# EAGLE board xerc2-1 (EAGLE 7.5.0)
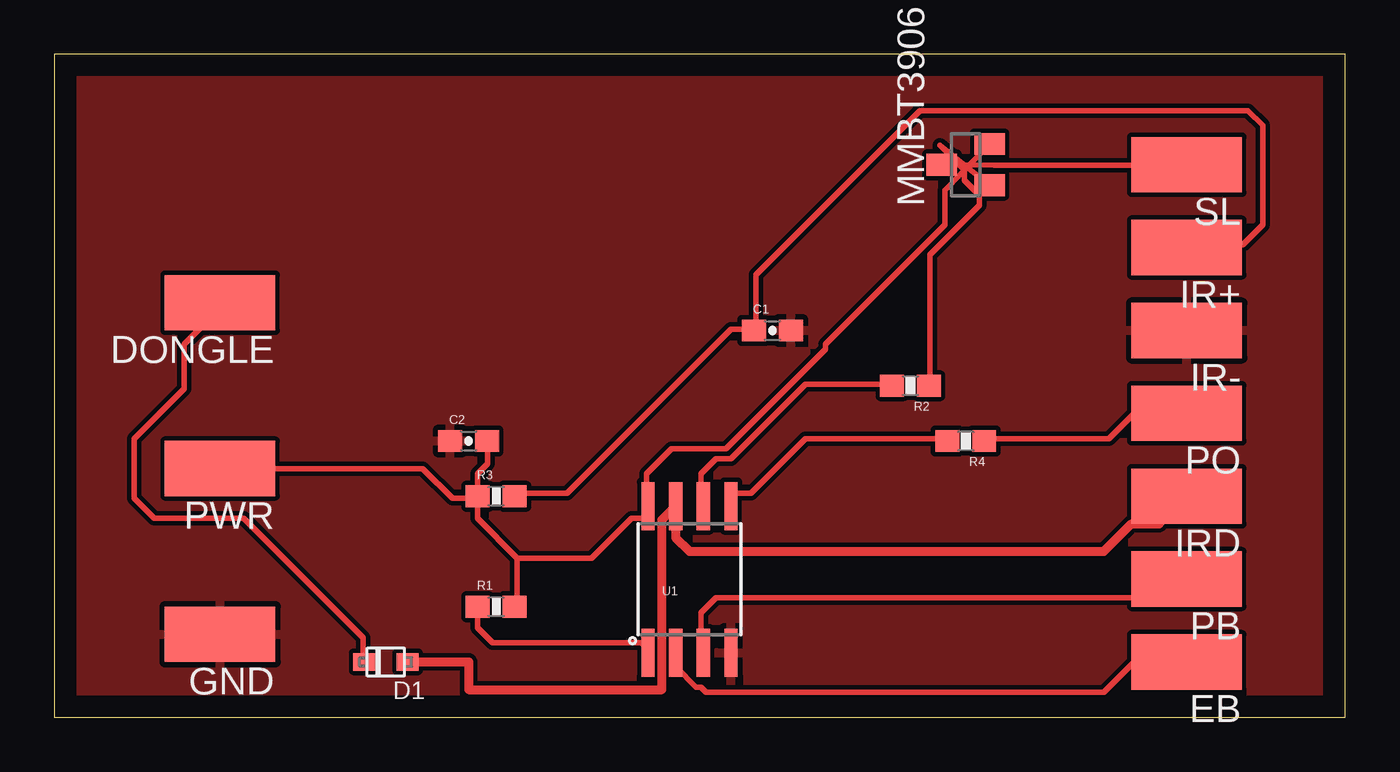
[diagram p0: board, top side]

Size 59.36 x 30.47 mm. Coordinates in mm from the lower left corner, seen from the top.
Outline: 0,0 59.36,0 59.36,30.47 0,30.47 0,0
Copper layers (1*16): Top 0.035mm / dielectric 1.5mm / Bottom 0.035mm
Design rules "default": minimum track width 10mil, minimum drill 24mil, track to track 8mil, track to pad 8mil, pad to pad 8mil, via to via 8mil, smd to smd 8mil, copper to edge 40mil, drill to drill 8mil, minimum pad ring 10mil, minimum via ring 8mil, stop-mask expansion 4mil, vias tented up to drill 0mil, thermal gap 10mil

## Footprints (pad centres in the part's own frame; a part is rotated, then mirrored left to right if it is on the bottom)
0603-CAP = smd 1.1 x 1: 1 -0.85,0; 2 0.85,0
SOD-323F = smd 1 x 0.8: A -1,0; C 1,0
SMD2,54-5,08 = smd 2.54 x 5.08: 1 0,0
SOT23 = smd 1 x 1.4: 1 -0.95,-1.1; 2 0.95,-1.1; 3 0,1.1
0603-RES = smd 1.1 x 1: 1 -0.85,0; 2 0.85,0
SO08-EIAJ = smd 0.61 x 2.21: 1 -1.905,-3.378; 2 -0.635,-3.378; 3 0.635,-3.378; 4 1.905,-3.378; 5 1.905,3.353; 6 0.635,3.353; 7 -0.635,3.353; 8 -1.905,3.353

## Placement (x,y rotation side)
C1  4.7uf  [0603-CAP]  33.02,17.78 0 top
C2  0.1uF  [0603-CAP]  19.05,12.7 0 top
D1  [SOD-323F]  15.24,2.54 180 top
DONGLE  [SMD2,54-5,08]  7.62,19.05 90 top
EB  [SMD2,54-5,08]  52.07,2.54 90 top
GND  [SMD2,54-5,08]  7.62,3.81 90 top
IR+  [SMD2,54-5,08]  52.07,21.59 90 top
IR-  [SMD2,54-5,08]  52.07,17.78 90 top
IRD  [SMD2,54-5,08]  52.07,10.16 90 top
MMBT3906  Q1  [SOT23]  41.91,25.4 90 top
PB  [SMD2,54-5,08]  52.07,6.35 90 top
PO  [SMD2,54-5,08]  52.07,13.97 90 top
PWR  [SMD2,54-5,08]  7.62,11.43 90 top
R1  10k  [0603-RES]  20.32,5.08 0 top
R2  10k  [0603-RES]  39.37,15.24 180 top
R3  100  [0603-RES]  20.32,10.16 0 top
R4  10k  [0603-RES]  41.91,12.7 180 top
SL  [SMD2,54-5,08]  52.07,25.4 90 top
U1  Tiny85-20-SMT  [SO08-EIAJ]  29.21,6.35 0 top

## Library data of the parts
C1 = SparkFun-Capacitors
C2 = SparkFun-Capacitors; PROD_ID: CAP-00810
D1 = adafruit
DONGLE EB GND IR+ IR- IRD PB PO PWR SL = wirepad
MMBT3906 = transistor-pnp
R1 R3 = SparkFun-Resistors
R2 R4 = SparkFun-Passives
U1 = SparkFun-DigitalIC; PROD_ID: IC-09092

## Nets
GND: C1.2 C2.1 GND.1 IR-.1 U1.4
N$1: PB.1 U1.3
N$2: R1.1 U1.1
N$3: EB.1 U1.2
N$4: D1.A IRD.1 U1.7
N$5: R2.2 U1.6
N$6: MMBT3906.1 R2.1
N$7: MMBT3906.3 SL.1
N$8: C1.1 IR+.1 R3.2
N$9: R4.2 U1.5
N$10: PO.1 R4.1
N$11: D1.C DONGLE.1
VCC: C2.2 MMBT3906.2 PWR.1 R1.2 R3.1 U1.8

## Tracks (layer width: path | path; a pad name or v marks a point on that pad's centre or on a via)
GND
  pour Top: 60.96,-1.27 1.27,-1.27 0,-1.27 0,38.1 60.96,38.1
N$1
  Top 0.254: U1.3 29.74,2.97 29.74,4.8 30.43,5.49 51.23,5.49 51.92,6.17 PB.1
N$2
  Top 0.254: R1.1 19.46,5.03 19.46,4.12 20.14,3.43 27,3.43 27.46,2.97 U1.1
N$3
  Top 0.254: U1.2 28.6,2.97 28.6,2.29 29.52,1.37 29.74,1.37 29.97,1.14 48.26,1.14 49.63,2.52 51.92,2.52 EB.1
N$4
  Top 0.406: D1.A 19.05,2.54 19.05,1.27 27.94,1.27 27.94,9.07 U1.7 28.57,8.26 29.21,7.62 48.26,7.62 49.53,8.89 50.8,8.89 IRD.1
N$5
  Top 0.254: R2.2 38.43,15.32 34.54,15.32 31.11,11.89 30.43,11.89 29.74,11.2 29.74,9.83 U1.6
N$6
  Top 0.254: R2.1 40.26,15.32 40.26,21.26 42.55,23.55 42.55,24 41.86,24.69 41.86,25.15 40.72,26.29 MMBT3906.1
N$7
  Top 0.254: MMBT3906.3 43.23,25.38 51.92,25.38 SL.1
N$8
  Top 0.254: R3.2 21.29,10.29 23.57,10.29 31.11,17.83 32.03,17.83 C1.1 32.26,17.83 32.26,20.34 39.8,27.89 54.89,27.89 55.57,27.2 55.57,22.63 54.66,21.72 52.15,21.72 IR+.1
N$9
  Top 0.254: U1.5 31.11,10.06 31.34,10.29 32.03,10.29 34.54,12.8 40.95,12.8 R4.2
N$10
  Top 0.254: R4.1 42.77,12.8 48.49,12.8 49.63,13.95 51.92,13.95 PO.1
N$11
  Top 0.254: D1.C 14.2,2.74 14.2,3.66 8.71,9.14 4.6,9.14 3.68,10.06 3.68,12.8 5.97,15.09 5.97,17.14 7.8,18.97 DONGLE.1
VCC
  Top 0.254: C2.2 19.91,12.57 19.91,11.66 19.46,11.2 19.46,10.29 R3.1 19.46,10.06 | 21.29,7.32 21.29,5.26 R1.2 | 21.29,7.32 19.46,9.14 19.46,10.06 | MMBT3906.2 40.95,24.23 40.95,22.63 35.46,17.14 35.46,16.92 30.89,12.34 28.37,12.34 27.23,11.2 27.23,9.83 U1.8 27.46,9.6 27.46,9.37 27.23,9.14 26.54,9.14 24.71,7.32 21.29,7.32 | PWR.1 16.94,11.43 18.31,10.06 19.46,10.06